# EAGLE board Leoracer_Schema (EAGLE 9.7.0)

Size 264.8 x 142.91 mm. Coordinates in mm from the lower left corner, seen from the top.
Outline: 0,0 264.8,0 264.8,142.91 0,142.91 0,0
Copper layers (1*16): Top 0.035mm / dielectric 1.5mm / Bottom 0.035mm
Design rules "default": minimum track width 6mil, minimum drill 0.35mm, track to track 6mil, track to pad 6mil, pad to pad 6mil, via to via 6mil, smd to smd 6mil, copper to edge 40mil, drill to drill 6mil, minimum pad ring 10mil, minimum via ring 8mil, stop-mask expansion 4mil, vias tented up to drill 0mil, thermal gap 10mil

## Footprints (pad centres in the part's own frame; a part is rotated, then mirrored left to right if it is on the bottom)
HA-06-SM065 = drill 1 pad 1.676: 1 -2.54,-2.54; 2 0,2.54; 3 2.54,-2.54
SWITCH-MOMENTARY-PTH-6.5MM = drill 1.016 pad 1.88: 1 -3.251,2.261; 2 3.251,2.261; 3 -3.251,-2.261; 4 3.251,-2.261
ARDUINO-UNO-R3-SHIELD = drill 1.016 pad 1.88: 3.3V 24.13,-2.54; 5V 24.13,0; A0 24.13,12.7; A1 24.13,15.24; A2 24.13,17.78; A3 24.13,20.32; A4 24.13,22.86; A5 24.13,25.4; AREF -24.13,-13.97; D2 -24.13,20.32; D3 -24.13,17.78; D4 -24.13,15.24; D5 -24.13,12.7; D6 -24.13,10.16; D7 -24.13,7.62; D8 -24.13,3.81; D9 -24.13,1.27; D10 -24.13,-1.27; D11 -24.13,-3.81; D12 -24.13,-6.35; D13 -24.13,-8.89; GND@0 24.13,2.54; GND@1 24.13,5.08; GND@2 -24.13,-11.43; IOREF 24.13,-7.62; NC 24.13,-10.16; RES 24.13,-5.08; RX -24.13,25.4; SCL -24.13,-19.05; SDA -24.13,-16.51; TX -24.13,22.86; VIN 24.13,7.62

## Placement (x,y rotation side)
RPOTTHROTTLE_LEFT  1k  [HA-06-SM065]  8.29,46.63 0 top
RPOTTHROTTLE_RIGHT3  1k  [HA-06-SM065]  175.77,46.9 0 top
RPOTTILT_LEFT  1k  [HA-06-SM065]  92.82,46.88 0 top
RPOTTILT_RIGHT3  1k  [HA-06-SM065]  257.75,46.9 0 top
SBUTTON_L1  SWITCH_MOMENTARY  [SWITCH-MOMENTARY-PTH-6.5MM]  8.26,32.69 90 top
SBUTTON_R1  SWITCH_MOMENTARY  [SWITCH-MOMENTARY-PTH-6.5MM]  176.2,30.37 90 top
SBUTTON_R2  SWITCH_MOMENTARY  [SWITCH-MOMENTARY-PTH-6.5MM]  176.61,17.53 90 top
STOGGLE  SWITCH_MOMENTARY  [SWITCH-MOMENTARY-PTH-6.5MM]  176.61,7.37 90 top
UARDUINO_LEONARDO  ARDUINO-UNO-R3-SHIELD  [ARDUINO-UNO-R3-SHIELD]  212.81,113.06 90 top

## Library data of the parts
RPOTTHROTTLE_LEFT RPOTTHROTTLE_RIGHT3 RPOTTILT_LEFT RPOTTILT_RIGHT3 SBUTTON_L1 SBUTTON_R1 SBUTTON_R2 STOGGLE UARDUINO_LEONARDO = Tinkercad

## Nets
UARDUINO_LEONARDO_5V: RPOTTHROTTLE_LEFT.1 RPOTTHROTTLE_RIGHT3.1 RPOTTILT_LEFT.1 RPOTTILT_RIGHT3.1 UARDUINO_LEONARDO.5V
UARDUINO_LEONARDO_A0: RPOTTHROTTLE_RIGHT3.2 UARDUINO_LEONARDO.A0
UARDUINO_LEONARDO_A1: RPOTTILT_RIGHT3.2 UARDUINO_LEONARDO.A1
UARDUINO_LEONARDO_A2: RPOTTHROTTLE_LEFT.2 UARDUINO_LEONARDO.A2
UARDUINO_LEONARDO_A3: RPOTTILT_LEFT.2 UARDUINO_LEONARDO.A3
UARDUINO_LEONARDO_D2: SBUTTON_L1.1 UARDUINO_LEONARDO.D2
UARDUINO_LEONARDO_D3: SBUTTON_R1.1 UARDUINO_LEONARDO.D3
UARDUINO_LEONARDO_D4: SBUTTON_R2.1 UARDUINO_LEONARDO.D4
UARDUINO_LEONARDO_D5: STOGGLE.1 UARDUINO_LEONARDO.D5
UARDUINO_LEONARDO_GND: RPOTTHROTTLE_LEFT.3 RPOTTHROTTLE_RIGHT3.3 RPOTTILT_LEFT.3 RPOTTILT_RIGHT3.3 SBUTTON_L1.4 SBUTTON_R1.4 SBUTTON_R2.4 STOGGLE.4 UARDUINO_LEONARDO.GND@0 UARDUINO_LEONARDO.GND@1 UARDUINO_LEONARDO.GND@2

## Tracks (layer width: path | path; a pad name or v marks a point on that pad's centre or on a via)
UARDUINO_LEONARDO_5V  (4 unrouted)
UARDUINO_LEONARDO_A0  (1 unrouted)
UARDUINO_LEONARDO_A1  (1 unrouted)
UARDUINO_LEONARDO_A2  (1 unrouted)
UARDUINO_LEONARDO_A3  (1 unrouted)
UARDUINO_LEONARDO_D2  (1 unrouted)
UARDUINO_LEONARDO_D3  (1 unrouted)
UARDUINO_LEONARDO_D4  (1 unrouted)
UARDUINO_LEONARDO_D5  (1 unrouted)
UARDUINO_LEONARDO_GND  (10 unrouted)